# EAGLE board df40-70-spacer (EAGLE 6.5.0)
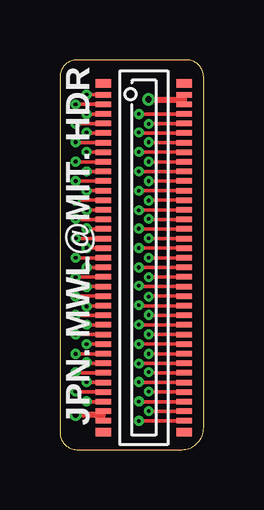
[diagram p0: board, top side]
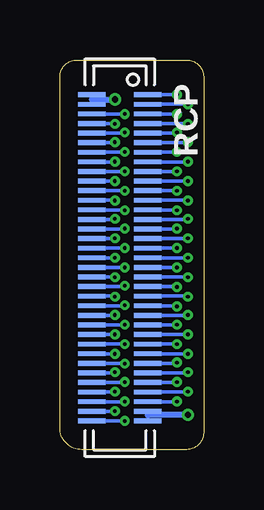
[diagram p1: board, bottom side, seen from below]

Size 6 x 16.25 mm. Coordinates in mm from the lower left corner, seen from the top.
Outline: 0,15.54 0,0.71 arc90 0.71,0 5.1,0 arc90 6,0.9 6,15.54 arc90 5.29,16.25 0.71,16.25 arc90 0,15.54
Copper layers (1*16): Top 0.035mm / dielectric 1.5mm / Bottom 0.035mm
Design rules "precision-image-2-layer *": minimum track width 2mil, minimum drill 6mil, track to track 2mil, track to pad 2mil, pad to pad 2mil, via to via 2mil, smd to smd 2mil, copper to edge 12mil, drill to drill 15mil, minimum pad ring 5mil, minimum via ring 5mil, stop-mask expansion 2mil, vias tented up to drill 20mil, thermal gap 10mil

## Footprints (pad centres in the part's own frame; a part is rotated, then mirrored left to right if it is on the bottom)
DF40-70REC = smd 0.2 x 1.14: 1 -6.8,1.17; 2 -6.4,1.17; 3 -6,1.17; 4 -5.6,1.17; 5 -5.2,1.17; 6 -4.8,1.17; 7 -4.4,1.17; 8 -4,1.17; 9 -3.6,1.17; 10 -3.2,1.17; 11 -2.8,1.17; 12 -2.4,1.17; 13 -2,1.17; 14 -1.6,1.17; 15 -1.2,1.17; 16 -0.8,1.17; 17 -0.4,1.17; 18 0,1.17; 19 0.4,1.17; 20 0.8,1.17; 21 1.2,1.17; 22 1.6,1.17; 23 2,1.17; 24 2.4,1.17; 25 2.8,1.17; 26 3.2,1.17; 27 3.6,1.17; 28 4,1.17; 29 4.4,1.17; 30 4.8,1.17; 31 5.2,1.17; 32 5.6,1.17; 33 6,1.17; 34 6.4,1.17; 35 6.8,1.17; 36 6.8,-1.17; 37 6.4,-1.17; 38 6,-1.17; 39 5.6,-1.17; 40 5.2,-1.17; 41 4.8,-1.17; 42 4.4,-1.17; 43 4,-1.17; 44 3.6,-1.17; 45 3.2,-1.17; 46 2.8,-1.17; 47 2.4,-1.17; 48 2,-1.17; 49 1.6,-1.17; 50 1.2,-1.17; 51 0.8,-1.17; 52 0.4,-1.17; 53 0,-1.17; 54 -0.4,-1.17; 55 -0.8,-1.17; 56 -1.2,-1.17; 57 -1.6,-1.17; 58 -2,-1.17; 59 -2.4,-1.17; 60 -2.8,-1.17; 61 -3.2,-1.17; 62 -3.6,-1.17; 63 -4,-1.17; 64 -4.4,-1.17; 65 -4.8,-1.17; 66 -5.2,-1.17; 67 -5.6,-1.17; 68 -6,-1.17; 69 -6.4,-1.17; 70 -6.8,-1.17
DF40-70HEAD = smd 0.23 x 0.66: 1 -6.8,-1.685; 2 -6.4,-1.685; 3 -6,-1.685; 4 -5.6,-1.685; 5 -5.2,-1.685; 6 -4.8,-1.685; 7 -4.4,-1.685; 8 -4,-1.685; 9 -3.6,-1.685; 10 -3.2,-1.685; 11 -2.8,-1.685; 12 -2.4,-1.685; 13 -2,-1.685; 14 -1.6,-1.685; 15 -1.2,-1.685; 16 -0.8,-1.685; 17 -0.4,-1.685; 18 0,-1.685; 19 0.4,-1.685; 20 0.8,-1.685; 21 1.2,-1.685; 22 1.6,-1.685; 23 2,-1.685; 24 2.4,-1.685; 25 2.8,-1.685; 26 3.2,-1.685; 27 3.6,-1.685; 28 4,-1.685; 29 4.4,-1.685; 30 4.8,-1.685; 31 5.2,-1.685; 32 5.6,-1.685; 33 6,-1.685; 34 6.4,-1.685; 35 6.8,-1.685; 36 6.8,1.685; 37 6.4,1.685; 38 6,1.685; 39 5.6,1.685; 40 5.2,1.685; 41 4.8,1.685; 42 4.4,1.685; 43 4,1.685; 44 3.6,1.685; 45 3.2,1.685; 46 2.8,1.685; 47 2.4,1.685; 48 2,1.685; 49 1.6,1.685; 50 1.2,1.685; 51 0.8,1.685; 52 0.4,1.685; 53 0,1.685; 54 -0.4,1.685; 55 -0.8,1.685; 56 -1.2,1.685; 57 -1.6,1.685; 58 -2,1.685; 59 -2.4,1.685; 60 -2.8,1.685; 61 -3.2,1.685; 62 -3.6,1.685; 63 -4,1.685; 64 -4.4,1.685; 65 -4.8,1.685; 66 -5.2,1.685; 67 -5.6,1.685; 68 -6,1.685; 69 -6.4,1.685; 70 -6.8,1.685 | smd 0.35 x 0.66: M1 -7.275,-1.685; M2 7.275,-1.685; M3 7.275,1.685; M4 -7.275,1.685

## Placement (x,y rotation side)
ATHRU_A_BOT  DF40REC  [DF40-70REC]  3.5,8 270 bottom
ATHRU_A_TOP  DF40HEAD  [DF40-70HEAD]  3.5,8 270 top

## Library data of the parts
ATHRU_A_BOT ATHRU_A_TOP = jonnew

## Nets
AGND_THRU_1: ATHRU_A_BOT.34 ATHRU_A_BOT.35 ATHRU_A_TOP.34 ATHRU_A_TOP.35
AGND_THRU_2: ATHRU_A_BOT.69 ATHRU_A_BOT.70 ATHRU_A_TOP.69 ATHRU_A_TOP.70
N$199: ATHRU_A_BOT.33 ATHRU_A_TOP.33
N$200: ATHRU_A_BOT.32 ATHRU_A_TOP.32
N$201: ATHRU_A_BOT.31 ATHRU_A_TOP.31
N$202: ATHRU_A_BOT.30 ATHRU_A_TOP.30
N$203: ATHRU_A_BOT.29 ATHRU_A_TOP.29
N$204: ATHRU_A_BOT.28 ATHRU_A_TOP.28
N$205: ATHRU_A_BOT.27 ATHRU_A_TOP.27
N$206: ATHRU_A_BOT.26 ATHRU_A_TOP.26
N$207: ATHRU_A_BOT.25 ATHRU_A_TOP.25
N$208: ATHRU_A_BOT.24 ATHRU_A_TOP.24
N$209: ATHRU_A_BOT.23 ATHRU_A_TOP.23
N$210: ATHRU_A_BOT.22 ATHRU_A_TOP.22
N$211: ATHRU_A_BOT.21 ATHRU_A_TOP.21
N$212: ATHRU_A_BOT.20 ATHRU_A_TOP.20
N$213: ATHRU_A_BOT.19 ATHRU_A_TOP.19
N$214: ATHRU_A_BOT.18 ATHRU_A_TOP.18
N$215: ATHRU_A_BOT.17 ATHRU_A_TOP.17
N$216: ATHRU_A_BOT.16 ATHRU_A_TOP.16
N$217: ATHRU_A_BOT.15 ATHRU_A_TOP.15
N$218: ATHRU_A_BOT.14 ATHRU_A_TOP.14
N$219: ATHRU_A_BOT.13 ATHRU_A_TOP.13
N$220: ATHRU_A_BOT.12 ATHRU_A_TOP.12
N$221: ATHRU_A_BOT.11 ATHRU_A_TOP.11
N$222: ATHRU_A_BOT.10 ATHRU_A_TOP.10
N$223: ATHRU_A_BOT.9 ATHRU_A_TOP.9
N$224: ATHRU_A_BOT.8 ATHRU_A_TOP.8
N$225: ATHRU_A_BOT.7 ATHRU_A_TOP.7
N$226: ATHRU_A_BOT.6 ATHRU_A_TOP.6
N$227: ATHRU_A_BOT.5 ATHRU_A_TOP.5
N$228: ATHRU_A_BOT.4 ATHRU_A_TOP.4
N$229: ATHRU_A_BOT.3 ATHRU_A_TOP.3
N$230: ATHRU_A_BOT.2 ATHRU_A_TOP.2
N$231: ATHRU_A_BOT.38 ATHRU_A_TOP.38
N$232: ATHRU_A_BOT.39 ATHRU_A_TOP.39
N$233: ATHRU_A_BOT.40 ATHRU_A_TOP.40
N$234: ATHRU_A_BOT.41 ATHRU_A_TOP.41
N$235: ATHRU_A_BOT.42 ATHRU_A_TOP.42
N$236: ATHRU_A_BOT.43 ATHRU_A_TOP.43
N$237: ATHRU_A_BOT.44 ATHRU_A_TOP.44
N$238: ATHRU_A_BOT.45 ATHRU_A_TOP.45
N$239: ATHRU_A_BOT.46 ATHRU_A_TOP.46
N$240: ATHRU_A_BOT.47 ATHRU_A_TOP.47
N$241: ATHRU_A_BOT.48 ATHRU_A_TOP.48
N$242: ATHRU_A_BOT.49 ATHRU_A_TOP.49
N$243: ATHRU_A_BOT.50 ATHRU_A_TOP.50
N$244: ATHRU_A_BOT.51 ATHRU_A_TOP.51
N$245: ATHRU_A_BOT.52 ATHRU_A_TOP.52
N$246: ATHRU_A_BOT.53 ATHRU_A_TOP.53
N$247: ATHRU_A_BOT.54 ATHRU_A_TOP.54
N$248: ATHRU_A_BOT.55 ATHRU_A_TOP.55
N$249: ATHRU_A_BOT.56 ATHRU_A_TOP.56
N$250: ATHRU_A_BOT.57 ATHRU_A_TOP.57
N$251: ATHRU_A_BOT.58 ATHRU_A_TOP.58
N$252: ATHRU_A_BOT.59 ATHRU_A_TOP.59
N$253: ATHRU_A_BOT.60 ATHRU_A_TOP.60
N$254: ATHRU_A_BOT.61 ATHRU_A_TOP.61
N$255: ATHRU_A_BOT.62 ATHRU_A_TOP.62
N$256: ATHRU_A_BOT.63 ATHRU_A_TOP.63
N$257: ATHRU_A_BOT.64 ATHRU_A_TOP.64
N$258: ATHRU_A_BOT.65 ATHRU_A_TOP.65
N$259: ATHRU_A_BOT.66 ATHRU_A_TOP.66
N$260: ATHRU_A_BOT.67 ATHRU_A_TOP.67
N$261: ATHRU_A_BOT.68 ATHRU_A_TOP.68
N$1000: ATHRU_A_BOT.37 ATHRU_A_TOP.37
REF_THRU_1: ATHRU_A_BOT.36 ATHRU_A_TOP.36
REF_THRU_2: ATHRU_A_BOT.1 ATHRU_A_TOP.1

## Tracks (layer width: path | path; a pad name or v marks a point on that pad's centre or on a via)
AGND_THRU_1  (via drill 0.25)
  Top 0.152: 1.81,1.45 ATHRU_A_TOP.34 | 1.78,1.45 1.81,1.45 | 1.81,1.45 ATHRU_A_TOP.35
  Top 0.254: 1.78,1.45 v0.65,1.45
  Bottom 0.152: ATHRU_A_BOT.35 ATHRU_A_BOT.34 2.33,1.45
  Bottom 0.254: v0.65,1.45 2.33,1.45
AGND_THRU_2  (via drill 0.25)
  Top 0.152: ATHRU_A_TOP.70 ATHRU_A_TOP.69 5.19,14.6
  Top 0.254: v3.7,14.6 5.19,14.6
  Bottom 0.152: ATHRU_A_BOT.70 ATHRU_A_BOT.69 4.67,14.6
  Bottom 0.254: 4.67,14.6 v3.7,14.6
N$199  (via drill 0.15)
  Top 0.152: ATHRU_A_TOP.33 v1.11,2 v1.11,2.01
  Bottom 0.152: v1.11,2.01 v1.11,2 ATHRU_A_BOT.33
N$200  (via drill 0.15)
  Top 0.152: ATHRU_A_TOP.32 v0.65,2.4 v0.65,2.41
  Bottom 0.152: v0.65,2.41 v0.65,2.4 ATHRU_A_BOT.32
N$201  (via drill 0.15)
  Top 0.152: ATHRU_A_TOP.31 1.11,2.8 v1.11,2.82
  Bottom 0.152: v1.11,2.82 1.11,2.8 ATHRU_A_BOT.31
N$202  (via drill 0.15)
  Top 0.152: ATHRU_A_TOP.30 0.65,3.2 v0.65,3.22
  Bottom 0.152: v0.65,3.22 0.65,3.2 ATHRU_A_BOT.30
N$203  (via drill 0.15)
  Top 0.152: ATHRU_A_TOP.29 1.11,3.6 v1.11,3.63
  Bottom 0.152: v1.11,3.63 1.11,3.6 ATHRU_A_BOT.29
N$204  (via drill 0.15)
  Top 0.152: ATHRU_A_TOP.28 v0.65,4 v0.65,3.99
  Bottom 0.152: v0.65,3.99 v0.65,4 ATHRU_A_BOT.28
N$205  (via drill 0.15)
  Top 0.152: ATHRU_A_TOP.27 v1.11,4.4 v1.11,4.39
  Bottom 0.152: v1.11,4.39 v1.11,4.4 ATHRU_A_BOT.27
N$206  (via drill 0.15)
  Top 0.152: ATHRU_A_TOP.26 v0.65,4.8 | v0.65,4.8
  Bottom 0.152: v0.65,4.8 | v0.65,4.8 ATHRU_A_BOT.26
N$207  (via drill 0.15)
  Top 0.152: ATHRU_A_TOP.25 v1.11,5.2 v1.11,5.21
  Bottom 0.152: v1.11,5.21 v1.11,5.2 ATHRU_A_BOT.25
N$208  (via drill 0.15)
  Top 0.152: ATHRU_A_TOP.24 v0.65,5.6 v0.65,5.61
  Bottom 0.152: v0.65,5.61 v0.65,5.6 ATHRU_A_BOT.24
N$209  (via drill 0.15)
  Top 0.152: ATHRU_A_TOP.23 1.11,6 v1.11,5.97
  Bottom 0.152: v1.11,5.97 1.11,6 ATHRU_A_BOT.23
N$210  (via drill 0.15)
  Top 0.152: ATHRU_A_TOP.22 0.65,6.4 v0.65,6.37
  Bottom 0.152: v0.65,6.37 0.65,6.4 ATHRU_A_BOT.22
N$211  (via drill 0.15)
  Top 0.152: ATHRU_A_TOP.21 1.11,6.8 v1.11,6.78
  Bottom 0.152: v1.11,6.78 1.11,6.8 ATHRU_A_BOT.21
N$212  (via drill 0.15)
  Top 0.152: ATHRU_A_TOP.20 v0.65,7.2 v0.65,7.19
  Bottom 0.152: v0.65,7.19 v0.65,7.2 ATHRU_A_BOT.20
N$213  (via drill 0.15)
  Top 0.152: ATHRU_A_TOP.19 v1.11,7.6 v1.11,7.59
  Bottom 0.152: v1.11,7.59 v1.11,7.6 ATHRU_A_BOT.19
N$214  (via drill 0.15)
  Top 0.152: ATHRU_A_TOP.18 v0.65,8
  Bottom 0.152: v0.65,8 ATHRU_A_BOT.18
N$215  (via drill 0.15)
  Top 0.152: ATHRU_A_TOP.17 v1.11,8.4 v1.11,8.41
  Bottom 0.152: v1.11,8.41 v1.11,8.4 ATHRU_A_BOT.17
N$216  (via drill 0.15)
  Top 0.152: ATHRU_A_TOP.16 v0.65,8.8 v0.65,8.81
  Bottom 0.152: v0.65,8.81 v0.65,8.8 ATHRU_A_BOT.16
N$217  (via drill 0.15)
  Top 0.152: ATHRU_A_TOP.15 1.11,9.2 v1.11,9.22
  Bottom 0.152: v1.11,9.22 1.11,9.2 ATHRU_A_BOT.15
N$218  (via drill 0.15)
  Top 0.152: ATHRU_A_TOP.14 0.65,9.6 v0.65,9.63
  Bottom 0.152: v0.65,9.63 0.65,9.6 ATHRU_A_BOT.14
N$219  (via drill 0.15)
  Top 0.152: ATHRU_A_TOP.13 1.11,10 v1.11,9.98
  Bottom 0.152: v1.11,9.98 1.11,10 ATHRU_A_BOT.13
N$220  (via drill 0.15)
  Top 0.152: ATHRU_A_TOP.12 v0.65,10.4 v0.65,10.39
  Bottom 0.152: v0.65,10.39 v0.65,10.4 ATHRU_A_BOT.12
N$221  (via drill 0.15)
  Top 0.152: ATHRU_A_TOP.11 v1.11,10.8 v1.11,10.79
  Bottom 0.152: v1.11,10.79 v1.11,10.8 ATHRU_A_BOT.11
N$222  (via drill 0.15)
  Top 0.152: ATHRU_A_TOP.10 v0.65,11.2 | v0.65,11.2
  Bottom 0.152: v0.65,11.2 | v0.65,11.2 ATHRU_A_BOT.10
N$223  (via drill 0.15)
  Top 0.152: ATHRU_A_TOP.9 v1.11,11.6 v1.11,11.61
  Bottom 0.152: v1.11,11.61 v1.11,11.6 ATHRU_A_BOT.9
N$224  (via drill 0.15)
  Top 0.152: ATHRU_A_TOP.8 v0.65,12 v0.65,12.01
  Bottom 0.152: v0.65,12.01 v0.65,12 ATHRU_A_BOT.8
N$225  (via drill 0.15)
  Top 0.152: ATHRU_A_TOP.7 1.11,12.4 v1.11,12.42
  Bottom 0.152: v1.11,12.42 1.11,12.4 ATHRU_A_BOT.7
N$226  (via drill 0.15)
  Top 0.152: ATHRU_A_TOP.6 0.65,12.8 v0.65,12.83
  Bottom 0.152: v0.65,12.83 0.65,12.8 ATHRU_A_BOT.6
N$227  (via drill 0.15)
  Top 0.152: ATHRU_A_TOP.5 1.11,13.2 v1.11,13.23
  Bottom 0.152: v1.11,13.23 1.11,13.2 ATHRU_A_BOT.5
N$228  (via drill 0.15)
  Top 0.152: ATHRU_A_TOP.4 0.71,13.6 v0.65,13.59
  Bottom 0.152: 2.33,13.59 ATHRU_A_BOT.4 v0.65,13.59
N$229  (via drill 0.15)
  Top 0.152: ATHRU_A_TOP.3 v1.11,13.99
  Bottom 0.152: 1.16,14 v1.11,13.99 ATHRU_A_BOT.3
N$230  (via drill 0.15)
  Top 0.152: ATHRU_A_TOP.2 v0.65,14.4
  Bottom 0.152: v0.65,14.4 ATHRU_A_BOT.2
N$231  (via drill 0.15)
  Top 0.152: ATHRU_A_TOP.38 v3.3,2 v3.3,2.01
  Bottom 0.152: v3.3,2.01 v3.3,2 ATHRU_A_BOT.38
N$232  (via drill 0.15)
  Top 0.152: ATHRU_A_TOP.39 v3.7,2.4 v3.7,2.41
  Bottom 0.152: v3.7,2.41 v3.7,2.4 ATHRU_A_BOT.39
N$233  (via drill 0.15)
  Top 0.152: ATHRU_A_TOP.40 3.3,2.8 v3.3,2.82
  Bottom 0.152: v3.3,2.82 3.3,2.8 ATHRU_A_BOT.40
N$234  (via drill 0.15)
  Top 0.152: ATHRU_A_TOP.41 3.7,3.2 v3.7,3.22
  Bottom 0.152: v3.7,3.22 3.7,3.2 ATHRU_A_BOT.41
N$235  (via drill 0.15)
  Top 0.152: ATHRU_A_TOP.42 3.3,3.6 v3.3,3.58
  Bottom 0.152: v3.3,3.58 3.3,3.6 ATHRU_A_BOT.42
N$236  (via drill 0.15)
  Top 0.152: ATHRU_A_TOP.43 v3.7,4 v3.7,3.99
  Bottom 0.152: v3.7,3.99 v3.7,4 ATHRU_A_BOT.43
N$237  (via drill 0.15)
  Top 0.152: ATHRU_A_TOP.44 v3.3,4.4 v3.3,4.39
  Bottom 0.152: v3.3,4.39 v3.3,4.4 ATHRU_A_BOT.44
N$238  (via drill 0.15)
  Top 0.152: ATHRU_A_TOP.45 4.52,4.8 v3.7,4.8
  Bottom 0.152: v3.7,4.8 | v3.7,4.8 ATHRU_A_BOT.45
N$239  (via drill 0.15)
  Top 0.152: ATHRU_A_TOP.46 v3.3,5.2 v3.3,5.21
  Bottom 0.152: v3.3,5.21 v3.3,5.2 ATHRU_A_BOT.46
N$240  (via drill 0.15)
  Top 0.152: ATHRU_A_TOP.47 v3.7,5.6 v3.7,5.61
  Bottom 0.152: v3.7,5.61 v3.7,5.6 ATHRU_A_BOT.47
N$241  (via drill 0.15)
  Top 0.152: ATHRU_A_TOP.48 3.3,6 v3.3,6.02
  Bottom 0.152: v3.3,6.02 3.3,6 ATHRU_A_BOT.48
N$242  (via drill 0.15)
  Top 0.152: ATHRU_A_TOP.49 3.7,6.4 v3.7,6.37
  Bottom 0.152: v3.7,6.37 3.7,6.4 ATHRU_A_BOT.49
N$243  (via drill 0.15)
  Top 0.152: ATHRU_A_TOP.50 3.3,6.8 v3.3,6.83
  Bottom 0.152: v3.3,6.83 3.3,6.8 ATHRU_A_BOT.50
N$244  (via drill 0.15)
  Top 0.152: ATHRU_A_TOP.51 v3.7,7.2 v3.7,7.19
  Bottom 0.152: v3.7,7.19 v3.7,7.2 ATHRU_A_BOT.51
N$245  (via drill 0.15)
  Top 0.152: ATHRU_A_TOP.52 v3.3,7.6 v3.3,7.59
  Bottom 0.152: v3.3,7.59 v3.3,7.6 ATHRU_A_BOT.52
N$246  (via drill 0.15)
  Top 0.152: ATHRU_A_TOP.53 v3.7,8
  Bottom 0.152: v3.7,8 ATHRU_A_BOT.53
N$247  (via drill 0.15)
  Top 0.152: ATHRU_A_TOP.54 v3.3,8.4 v3.3,8.41
  Bottom 0.152: v3.3,8.41 v3.3,8.4 ATHRU_A_BOT.54
N$248  (via drill 0.15)
  Top 0.152: ATHRU_A_TOP.55 v3.7,8.8 v3.7,8.81
  Bottom 0.152: v3.7,8.81 v3.7,8.8 ATHRU_A_BOT.55
N$249  (via drill 0.15)
  Top 0.152: ATHRU_A_TOP.56 3.3,9.2 v3.3,9.22
  Bottom 0.152: v3.3,9.22 3.3,9.2 ATHRU_A_BOT.56
N$250  (via drill 0.15)
  Top 0.152: ATHRU_A_TOP.57 3.7,9.6 v3.7,9.63
  Bottom 0.152: v3.7,9.63 3.7,9.6 ATHRU_A_BOT.57
N$251  (via drill 0.15)
  Top 0.152: ATHRU_A_TOP.58 3.3,10 v3.3,9.98
  Bottom 0.152: v3.3,9.98 3.3,10 ATHRU_A_BOT.58
N$252  (via drill 0.15)
  Top 0.152: ATHRU_A_TOP.59 v3.7,10.4 v3.7,10.39
  Bottom 0.152: v3.7,10.39 v3.7,10.4 ATHRU_A_BOT.59
N$253  (via drill 0.15)
  Top 0.152: ATHRU_A_TOP.60 v3.3,10.8 v3.3,10.79
  Bottom 0.152: v3.3,10.79 v3.3,10.8 ATHRU_A_BOT.60
N$254  (via drill 0.15)
  Top 0.152: ATHRU_A_TOP.61 v3.7,11.2 | v3.7,11.2
  Bottom 0.152: v3.7,11.2 | v3.7,11.2 ATHRU_A_BOT.61
N$255  (via drill 0.15)
  Top 0.152: ATHRU_A_TOP.62 v3.3,11.6 v3.3,11.61
  Bottom 0.152: v3.3,11.61 v3.3,11.6 ATHRU_A_BOT.62
N$256  (via drill 0.15)
  Top 0.152: ATHRU_A_TOP.63 v3.7,12 v3.7,12.01
  Bottom 0.152: v3.7,12.01 v3.7,12 ATHRU_A_BOT.63
N$257  (via drill 0.15)
  Top 0.152: ATHRU_A_TOP.64 3.3,12.4 v3.3,12.42
  Bottom 0.152: v3.3,12.42 3.3,12.4 ATHRU_A_BOT.64
N$258  (via drill 0.15)
  Top 0.152: ATHRU_A_TOP.65 3.7,12.8 v3.7,12.83
  Bottom 0.152: v3.7,12.83 3.7,12.8 ATHRU_A_BOT.65
N$259  (via drill 0.15)
  Top 0.152: ATHRU_A_TOP.66 3.3,13.2 v3.3,13.23
  Bottom 0.152: v3.3,13.23 3.3,13.2 ATHRU_A_BOT.66
N$260  (via drill 0.15)
  Top 0.152: ATHRU_A_TOP.67 v3.7,13.6 v3.7,13.59
  Bottom 0.152: v3.7,13.59 v3.7,13.6 ATHRU_A_BOT.67
N$261  (via drill 0.15)
  Top 0.152: ATHRU_A_TOP.68 v3.3,14 v3.3,13.99
  Bottom 0.152: ATHRU_A_BOT.68 v3.3,14 v3.3,13.99
N$1000  (via drill 0.15)
  Top 0.152: ATHRU_A_TOP.37 v3.7,1.6
  Bottom 0.152: v3.7,1.6 ATHRU_A_BOT.37
REF_THRU_1  (via drill 0.15)
  Top 0.152: ATHRU_A_TOP.36 v3.3,1.2 v3.3,1.19
  Bottom 0.152: v3.3,1.19 v3.3,1.2 ATHRU_A_BOT.36
REF_THRU_2  (via drill 0.15)
  Top 0.152: v1.11,14.81 v1.11,14.8 ATHRU_A_TOP.1
  Bottom 0.152: ATHRU_A_BOT.1 v1.11,14.8 v1.11,14.81

## Text on the board
tPlace: JPN. MWL@MIT. HDR
bPlace: RCP